# Altium PCB Main Controller.PcbDoc
Units mil, origin at the board's own origin, x right, y up, seen from the top; angles counter-clockwise.
Board outline 2380 x 3120 mil, 2 copper layers (Top Layer, Bottom Layer); 78 components, 83 nets, 282 pads, 1 vias.
Unrouted connection lines stored in the file: 166.
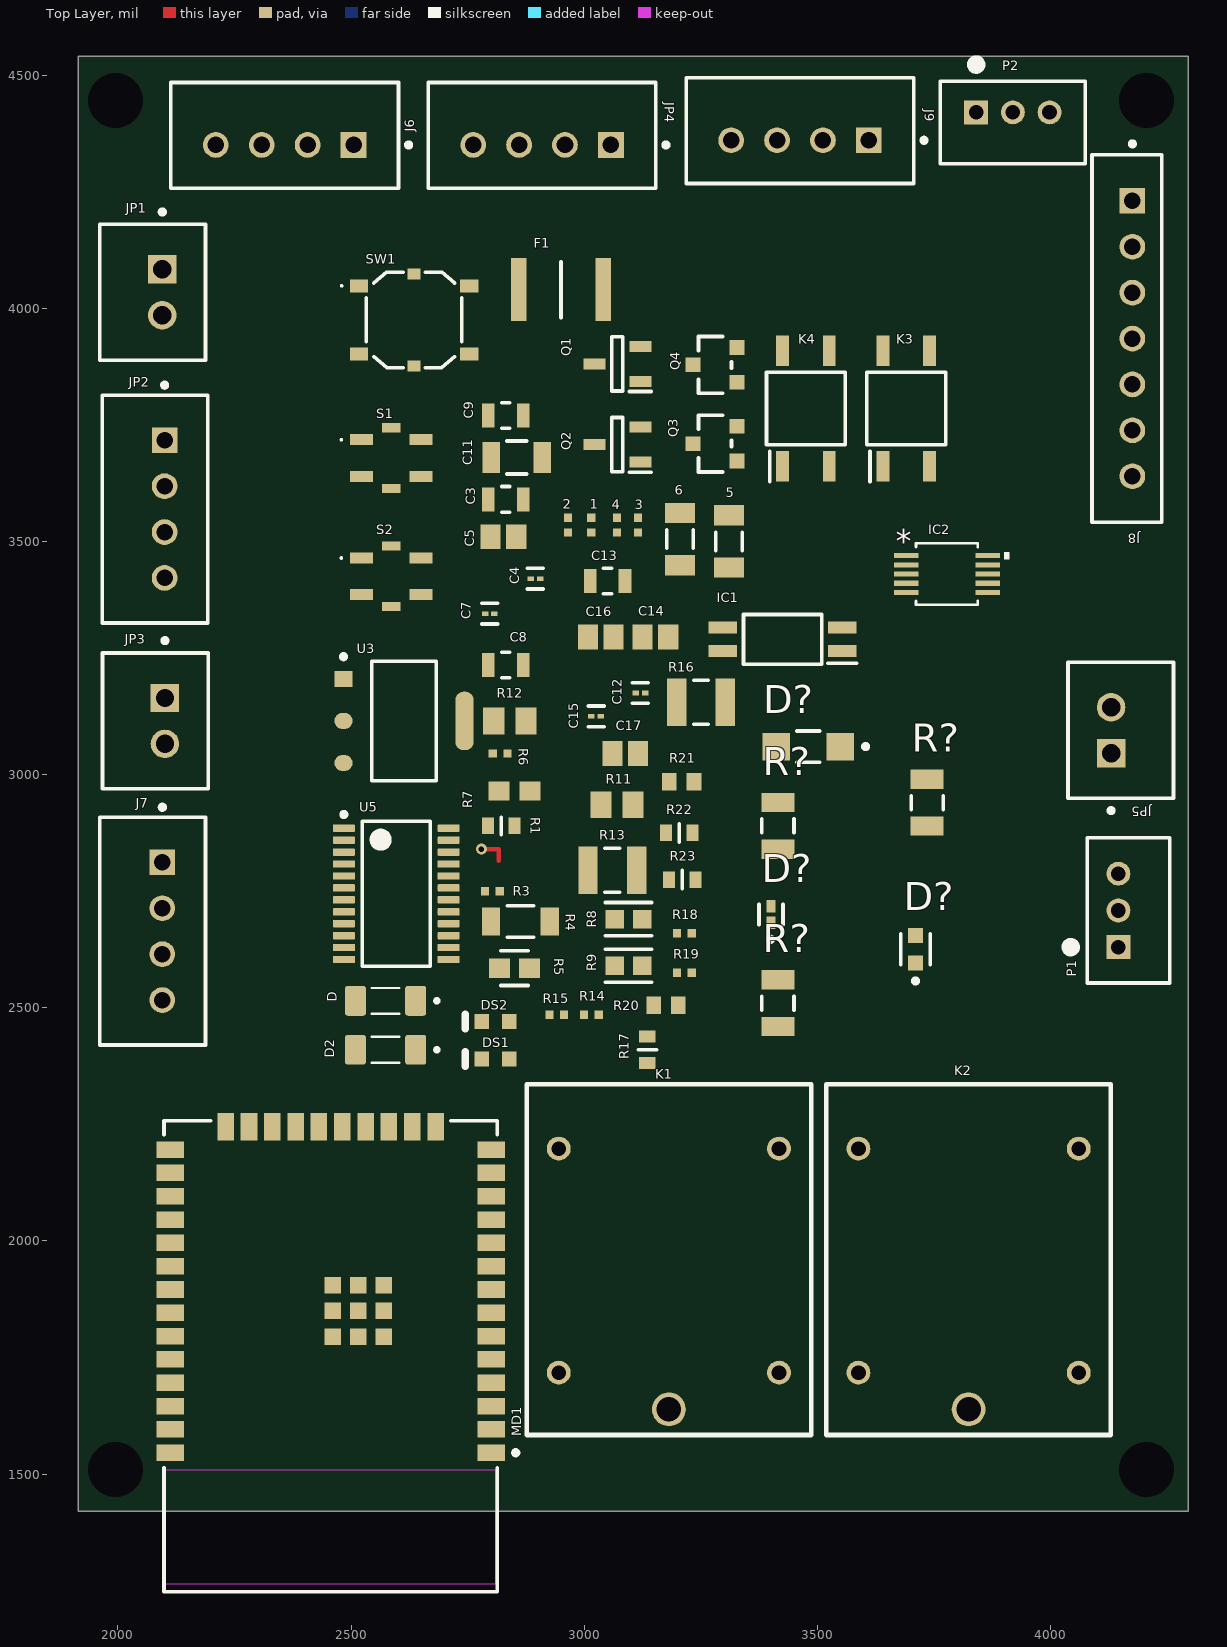
[diagram p0: Top Layer view]
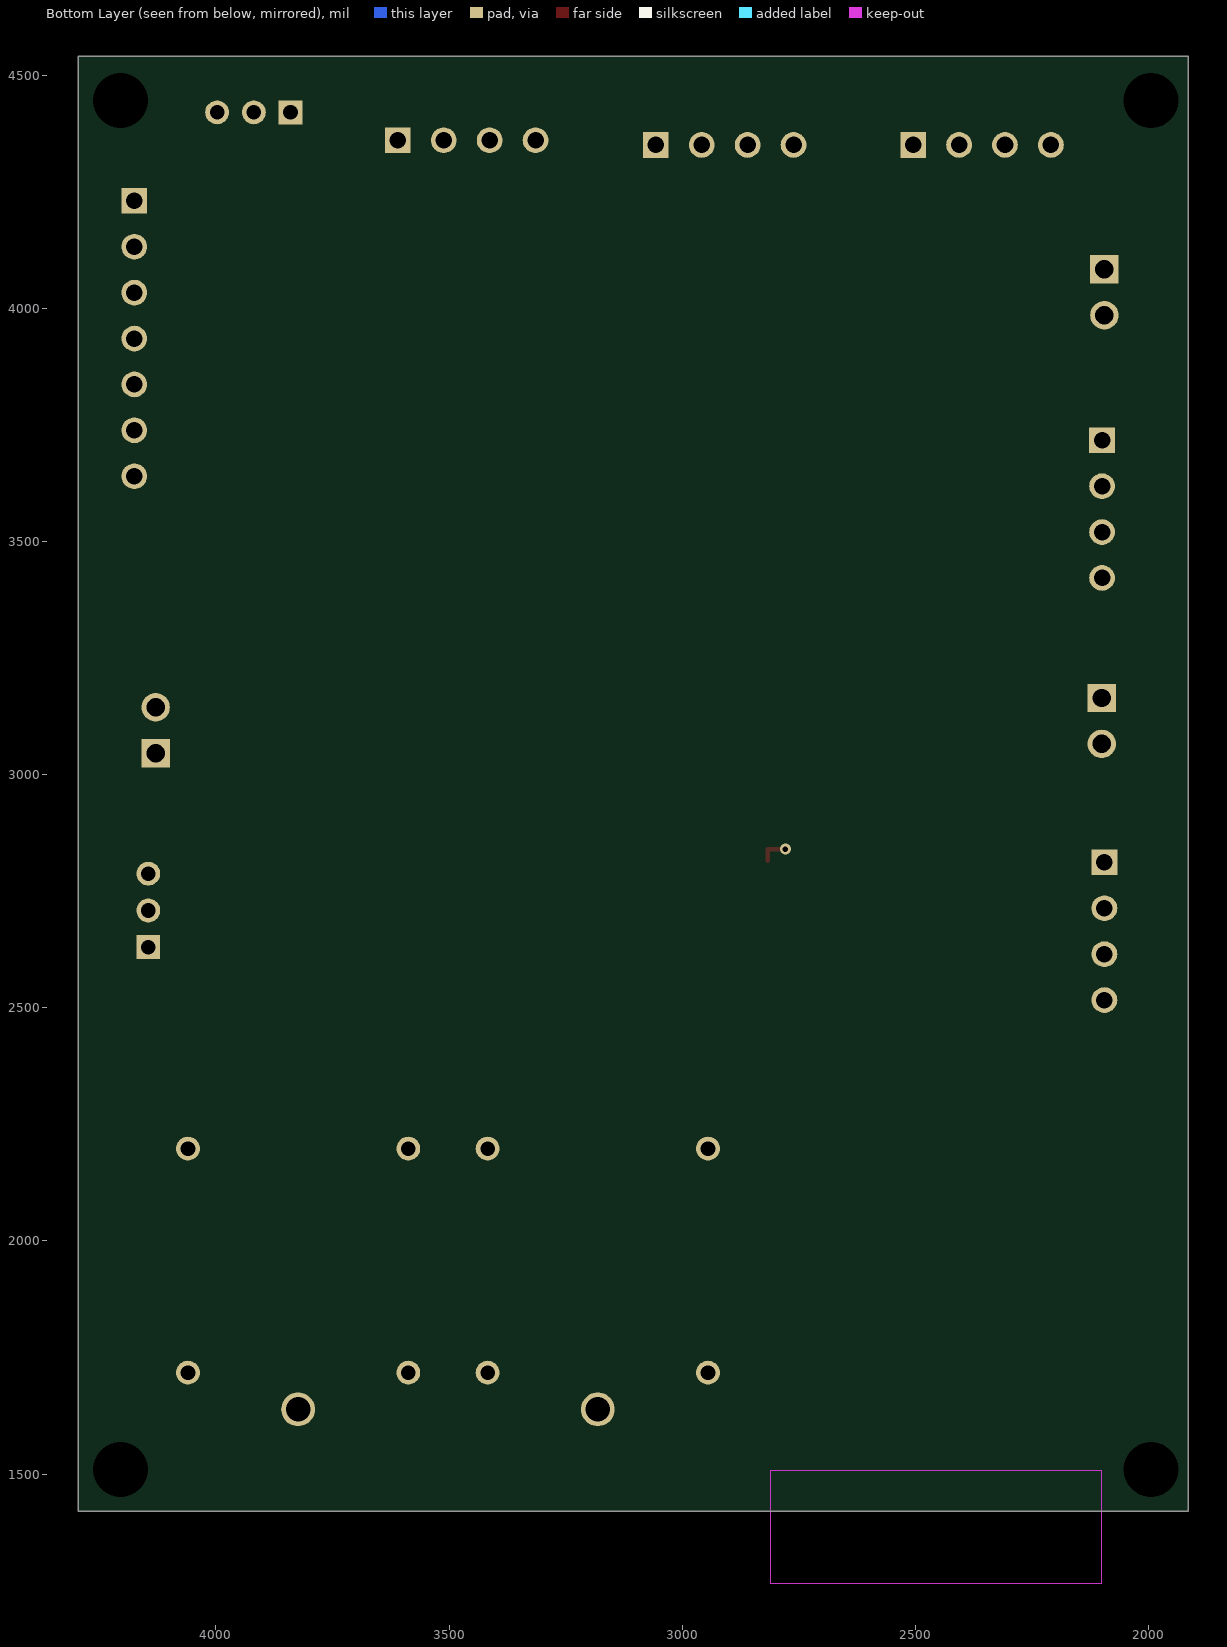
[diagram p1: Bottom Layer view, seen from below]

## Layer stack, top to bottom
Top Solder: solder mask 0.4, Solder Resist, Dk 3.5
Top Layer: signal copper 1.4
Dielectric 1: dielectric 12.6, FR-4, Dk 4.8
Bottom Layer: signal copper 1.4
Bottom Solder: solder mask 0.4, Solder Resist, Dk 3.5

## Board outline
1915,1420 4295,1420 4295,4540 1915,4540

## Design rules (kind name [scope] priority, off if disabled: settings)
BoardOutlineClearance [All] p1: gap=7.87 ignorepadtopadclearanceinfootprint=FALSE
Clearance [All] p1: gap=5 ignorepadtopadclearanceinfootprint=FALSE except(9.84: Arc-Hole Track-Hole SMDPad-Hole THPad-Hole Via-Hole Fill-Hole Poly-Hole Region-Hole Text-Hole)
ComponentClearance [All] p1: gap=5 collisioncheckmode=3 verticalgap=5 showdistances=TRUE
DiffPairsRouting [All] p1: maxlimit=10 minlimit=5 mostfreqgap=5 toplayer_minwidth=5 toplayer_maxwidth=1000 toplayer_prefwidth=5 bottomlayer_minwidth=5 bottomlayer_maxwidth=1000 bottomlayer_prefwidth=5 maxuncoupledlength=500
Height [All] p1: minheight=0 maxheight=71497.94 prefheight=500
HoleSize [All] p1: absolutevalues=TRUE maxlimit=248.03 minlimit=11.81 maxpercent=80.000 minpercent=20.000
HoleToHoleClearance [All] p1: gap=9.84 allowstackedmicrovias=FALSE
MinimumAnnularRing [All] p1: minimumring=3
MinimumSolderMaskSliver [All] p1: minsoldermaskwidth=0
PlaneClearance [All] p1: clearance=5
PlaneConnect PlaneConnectPowerPads [InPadClass('PowerPads')] p1: planeconnectstyle=Direct reliefexpansion=20 reliefentries=4 reliefconductorwidth=10 reliefairgap=10
PlaneConnect [All] p2: pad.planeconnectstyle=Relief pad.reliefexpansion=11.81 pad.reliefentries=4 pad.reliefconductorwidth=5 pad.reliefairgap=5 via.planeconnectstyle=Direct via.reliefexpansion=11.81 via.reliefentries=4 via.reliefconductorwidth=5 via.reliefairgap=5
PolygonConnect PolygonConnectPowerPads [All vs (InPadClass('PowerPads'))] p1: connectstyle=Direct reliefconductorwidth=10 reliefentries=4 polygonreliefangle="90 Angle" airgapwidth=10
PolygonConnect [All] p2: thpad.connectstyle=Relief thpad.reliefconductorwidth=5 thpad.reliefentries=4 thpad.polygonreliefangle="90 Angle" thpad.airgapwidth=5 smdpad.connectstyle=Relief smdpad.reliefconductorwidth=5 smdpad.reliefentries=4 smdpad.polygonreliefangle="90 Angle" smdpad.airgapwidth=5 via.connectstyle=Direct via.reliefconductorwidth=5 via.reliefentries=4 via.polygonreliefangle="90 Angle" via.airgapwidth=5
RoutingVias [All] p1: holewidth=11.81 width=23.62 viastyle="Through Hole" minholewidth=11.81 minwidth=23.62 maxholewidth=23.62 maxwidth=259.84
SilkToSilkClearance [All] p1: silktosilkclearance=0
SilkToSolderMaskClearance [IsPad] p1: minsilkscreentomaskgap=5 clearancetoexposedcopper=TRUE
SolderMaskExpansion [All] p1: expansion=2.95 istentingtop=FALSE
Width [All] p1: maxlimit=1000 minlimit=10 preferedwidth=10 minimp=50.000000 maximp=50.000000 favimp=50.000000
20 further rules are at their usual default settings.

## Classes and differential pairs
component class Sheet1: 1 2 3 4 5 6 C3 C4 C5 C7 C8 C9 C11 C12 C13 C14 C15 C16 C17 D D2 D? DS1 DS2 F1 IC1 IC2 J6 J7 J8 J9 JP1 JP2 JP3 JP4 JP5 K1 K2 K3 K4 MD1 P1 P2 Q1 Q2 Q3 Q4 R1 R3 R4 R5 R6 R7 R8 R9 R11 R12 R13 R14 R15 R16 R17 R18 R19 R20 R21 R22 R23 R? S1 S2 SW1 U3 U5

## Components (designator, comment, footprint, x,y, rotation, side; value= is the part's Value field where it differs from the comment)
1 "ERJ2RKF5600X" RESC1005X40X25LL05T05 3015,3535 r90 top
2 "ERJ2RKF5600X" RESC1005X40X25LL05T05 2965,3535 r90 top
3 "ERJ2RKF5600X" RESC1005X40X25LL05T05 3115,3535 r90 top
4 "ERJ2RKF5600X" RESC1005X40X25LL05T05 3070,3535 r90 top
5 "ERJ8ENF5102V" RESC3216X70X50NL05T20 3310,3500 r90 top
6 "ERJ8ENF5102V" RESC3216X70X50NL05T20 3205,3505 r90 top
C3 "GRM21BR60J226ME39L" FP-GRM21B-0_15-MFG 2831.38,3590 r0 top
C4 "GRM033R61A104KE15D" FP-GRM033-0_03-IPC_C 2895,3420 r0 top
C5 "C0805C105K4PACTU" CAPC2013X145X50LL20T25 2826.46,3510 r0 top
C7 "GRM033R61A104KE15D" FP-GRM033-0_03-IPC_C 2797.18,3345 r180 top
C8 "GRM21BR60J226ME39L" FP-GRM21B-0_15-MFG 2831.38,3235 r0 top
C9 "GRM21BR60J226ME39L" FP-GRM21B-0_15-MFG 2831.38,3770 r0 top
C11 "C1206C104K1RACTU" FP-C1206C-EB-MFG 2855,3680 r180 top value="0.10 μF"
C12 "GRM033R61A104KE15D" FP-GRM033-0_03-IPC_C 3120,3175 r0 top
C13 "GRM21BR60J226ME39L" FP-GRM21B-0_15-MFG 3050,3415 r0 top
C14 "C0805C105K4PACTU" CAPC2013X145X50LL20T25 3152.44,3295 r180 top
C15 "GRM033R61A104KE15D" FP-GRM033-0_03-IPC_C 3025,3125 r180 top
C16 "C0805C105K4PACTU" CAPC2013X145X50LL20T25 3035,3295 r180 top
C17 "C0805C105K4PACTU" CAPC2013X145X50LL20T25 3087.56,3045 r180 top
D "FDLL4148" DIOMELF3414N 2573.7,2515 r180 top
D2 "FDLL4148" DIOMELF3414N 2573.7,2410 r180 top
D? "LTST-C193TBKT-5A" FP-LTST-C193TBKT-5A-MFG 3710,2625.47 r90 top
D? "APG1005CGC-T" FP-APG1005CGC-T-MFG 3400,2700 r90 top
D? "HSMS-C150" FP-HSMS-C150-MFG 3480,3060 r180 top
DS1 "HSMY-C190" AVAG-HSMX-C190_V 2809.42,2390 r180 top
DS2 "HSMY-C190" AVAG-HSMX-C190_V 2809.42,2470.43 r180 top
F1 "MF-MSMF150-2" FUSC4632X85N 2950,4040 r0 top
IC1 "EL3H7_B__TA_-G" SOIC127P700X200-4N 3425,3290 r180 top
IC2 "INA229AIDGST" VSSOP10_DGS_TEX 3777.25,3430 r0 top
J6 "B4B-XH-A(LF)(SN)" FP-B4B-XH-A_LF_SN-MFG#1 2357.36,4370.67 r0 top
J7 "B4B-XH-A(LF)(SN)" FP-B4B-XH-A_LF_SN-MFG#2 2074.33,2664.21 r90 top
J8 "B7B-EH-A(LF)(SN)" FP-B7B-EH-A_LF_SN-MFG 4163.19,3935 r270 top
J9 "B4B-XH-A(LF)(SN)" FP-B4B-XH-A_LF_SN-MFG#2 3462.36,4380.67 r0 top
JP1 "B2B-XH-A(LF)(SN)" FP-B2B-XH-A_LF_SN-MFG 2074.33,4034.21 r270 top
JP2 "B4B-XH-A(LF)(SN)" FP-B4B-XH-A_LF_SN-MFG#2 2079.33,3569.21 r90 top
JP3 "B2B-XH-A(LF)(SN)" FP-B2B-XH-A_LF_SN-MFG 2080,3115 r270 top
JP4 "B4B-XH-A(LF)(SN)" FP-B4B-XH-A_LF_SN-MFG#2 2909.21,4370.67 r0 top
JP5 "B2B-XH-A(LF)(SN)" FP-B2B-XH-A_LF_SN-MFG 4150,3095 r90 top
K1 "SRD-05VDC-SL-C" SRD 3181.22,1638.98 r90 top
K2 "SRD-05VDC-SL-C" SRD 3823.78,1638.98 r90 top
K3 "AQY-282SX" SOP254P680X230-4N 3690,3785 r90 top
K4 "AQY-282SX" SOP254P680X230-4N 3475,3785 r90 top
MD1 "ESP32-WROOM-32E (4MB)" FP-ESP32-WROOM-32E_4MB-MFG 2456.06,1753.03 r180 top
P1 "B3B-PH-K-S(LF)(SN)" JST-B3B-PH-K-S-3_V 4166.65,2708.74 r90 top
P2 "B3B-PH-K-S(LF)(SN)" JST-B3B-PH-K-S-3_V 3918.74,4398.35 r0 top
Q1 "AO3400A" SOT95P280X125-3N 3070.79,3880.47 r180 top
Q2 "AO3401A" SOT95P280X125-3N 3070.79,3707.6 r180 top
Q3 "AO3400A" FP-SOT23-MFG 3280,3709.64 r180 top
Q4 "AO3400A" FP-SOT23-MFG 3280,3878.43 r180 top
R1 "ERJ3EKF1800V" FP-ERJ3EK-MFG 2821.54,2890 r0 top value=180Ω
R3 "ERJ2RKF1002X" RESC1005X40X25LL05T05 2802.84,2750 r0 top
R4 "RT1206FRE072K2L" FP-RT1206-MFG 2862.87,2685 r0 top value=2.2KΩ
R5 "CRCW06031M00FKEA" FP-CRCW0603-e3-IPC_A 2850.39,2585 r0 top
R6 "ERJ2RKF1002X" RESC1005X40X25LL05T05 2819.25,3045 r0 top
R7 "ERJ-3EKF1200V" RESC1609X55X30ML15T15 2850.08,2965 r0 top
R8 "ERA3AEB222V" FP-ERA3A-IPC_B 3094.55,2690 r0 top
R9 "ERA3AEB222V" FP-ERA3A-IPC_B 3094.55,2590 r0 top
R11 "ERJ6ENF2200V" RESC2013X70X40NL20T20 3070,2935 r0 top
R12 "ERJ6ENF2200V" RESC2013X70X40NL20T20 2840.24,3115 r0 top
R13 "ERJ-14NF10R0U" RESC3225X70X50LL20T20 3060,2795 r0 top
R14 "ERJ2RKF1002X" RESC1005X40X25LL05T05 3015,2485 r180 top
R15 "ERJ2RKF1002X" RESC1005X40X25LL05T05 2940.75,2485 r180 top
R16 "ERJ-14NF10R0U" RESC3225X70X50LL20T20 3250,3155 r0 top
R17 "ERA-3AEB223V" FP-ERA3A-MFG 3135,2410 r270 top
R18 "ERJ2RKF1002X" RESC1005X40X25LL05T05 3214.25,2660 r180 top
R19 "ERJ2RKF1002X" RESC1005X40X25LL05T05 3214.25,2575 r180 top
R20 "ERJ-3GEYJ513V" RESC1608X55X30NL15T15 3175,2505 r180 top
R21 "ERJ-3GEYJ513V" RESC1608X55X30NL15T15 3208.42,2985 r0 top
R22 "ERA-3AEB223V" FP-ERA3A-MFG 3203.5,2875 r180 top
R23 "ERA-3AEB223V" FP-ERA3A-MFG 3210,2775 r180 top
R? "CRCW1206330RFKEA" FP-CRCW1206-e3-MFG 3735,2940 r90 top
R? "CRCW1206330RFKEA" FP-CRCW1206-e3-MFG 3415,2890 r90 top
R? "CRCW1206330RFKEA" FP-CRCW1206-e3-MFG 3415,2510 r90 top
S1 "TS21-34-035-BK-160-SMT-TR" TS2134035BK160SMTTR 2585.79,3678.66 r0 top
S2 "TS21-34-035-BK-160-SMT-TR" TS2134035BK160SMTTR 2585.79,3425.04 r0 top
SW1 "PTS526SMG20SMTR21_LFS" PTS526SMG20SMTR21LFS 2635,3975 r0 top
U3 "AMS1117-3.3" FP-AMS1117-IPC_C 2613.23,3115 r0 top
U5 "TCA6416APWR" PW0024A_L 2596.61,2744.25 r0 top

## Footprints (in the part's own frame and the unit in brackets; to place one, negate y for a bottom-side part, rotate by r counter-clockwise, add the part's x,y. Pads: shape width x height; smd on the part's side, far side on the other; paste and mask are expansions set on the pad)
AVAG-HSMX-C190_V [mm] "SMD, 2-Leads, Body 1.6x0.8mm, Height 0.9mm"
  rect 0.8x0.8 smd: 1(-0.75,0) 2(0.75,0)
  silkscreen extent 1.65,-0.4 1.65,0.4, body extent -0.8,-0.4 0.8,0.4, height 0.9
CAPC2013X145X50LL20T25 [mm] "Chip Capacitor, 2-Leads, Body 2.00x1.25mm, IPC High Density"
  rect 1.1x1.35 smd: 1(-0.7,0) 2(0.7,0)
  body extent -1.1,-0.72 1.1,0.72, height 1.45
DIOMELF3414N [mm]
  rrect25% 1.14x1.63 smd: A(1.64,0) C(-1.64,0)
  silkscreen extent -2.9,-0.7 0.75,0.7
FP-AMS1117-IPC_C [mm]
  rect 1.004x0.872 smd paste+0 mask+0: 1(-3.295,2.29)
  rrect100% 1.004x0.872 smd paste+0 mask+0: 2(-3.295,0) 3(-3.295,-2.29)
  rrect87% 1.004x3.182 smd paste+0 mask+0: 4(3.295,0)
  silkscreen extent -3.42,-3.25 1.75,3.62, body extent -3.9,-3.35 3.9,3.35, height 0.25
FP-APG1005CGC-T-MFG [mm]
  rect 0.7x0.5 smd paste+0 mask+0: 1(-0.45,0) 2(0.45,0)
  silkscreen extent -1.47,-0.65 0.55,0.65, body extent -0.9,-0.4 0.9,0.4, height 0.25
FP-B2B-XH-A_LF_SN-MFG [mm]
  rect 1.55x1.55 hole 1 paste-1000 mask+0: 1(-1.25,0.525)
  round 1.55 hole 1 paste-1000 mask+0: 2(1.25,0.525)
  silkscreen extent -4.5,-2.88 3.7,2.87, body extent -3.8,-2.98 3.8,2.98, height 0.25
FP-B4B-XH-A_LF_SN-MFG#1 [mm]
  rect 1.4x1.4 hole 0.9 paste-1000 mask+0: 1(3.75,-0.525)
  round 1.4 hole 0.9 paste-1000 mask+0: 2(1.25,-0.525) 4(-3.75,-0.525) " "(-1.25,-0.525)
  silkscreen extent -6.2,-2.88 6.88,2.87, body extent -6.3,-2.98 6.3,2.98, height 0.25
FP-B4B-XH-A_LF_SN-MFG#2 [mm]
  rect 1.4x1.4 hole 0.9 paste-1000 mask+0: 1(3.75,-0.525)
  round 1.4 hole 0.9 paste-1000 mask+0: 2(1.25,-0.525) 3(-1.25,-0.525) 4(-3.75,-0.525)
  silkscreen extent -6.2,-2.88 6.87,2.87, body extent -6.3,-2.98 6.3,2.98, height 0.25
FP-B7B-EH-A_LF_SN-MFG [mm]
  rect 1.4x1.4 hole 0.9 paste-1000 mask+0: 1(-7.5,0.3)
  round 1.4 hole 0.9 paste-1000 mask+0: 2(-5,0.3) 3(-2.5,0.3) 4(0,0.3) 5(2.5,0.3) 6(5,0.3) 7(7.5,0.3)
  silkscreen extent -10.72,-1.9 10,1.9, body extent -10.1,-2 10.1,2, height 0.25
FP-C1206C-EB-MFG [mm]
  rect 0.95x1.7 smd paste+0 mask+0: 1(-1.4,0) 2(1.4,0)
  silkscreen extent -0.55,-0.9 0.55,0.9, body extent -2,-1 2,1, height 0.25
FP-CRCW0603-e3-IPC_A [mil]
  rect 44.69x41.82 smd paste+0 mask+0: 1(-32.1,0) 2(32.1,0)
  silkscreen extent -30,-37 30,37, body extent -74,-41 74,41, height 10
FP-CRCW1206-e3-MFG [mm]
  rect 1.05x1.8 smd paste+0 mask+0: 1(-1.275,0) 2(1.275,0)
  silkscreen extent -0.38,-0.87 0.38,0.87, body extent -1.9,-1 1.9,1, height 0.25
FP-ERA3A-IPC_B [mil]
  rect 39.58x39.61 smd paste+0 mask+0: 1(-29.55,0) 2(29.55,0)
  silkscreen extent -49,-36 49,36, body extent -59,-30 59,30, height 10
FP-ERA3A-MFG [mm]
  rect 0.65x0.9 smd paste+0 mask+0: 1(-0.725,0) 2(0.725,0)
  silkscreen extent 0,-0.5 0,0.5, body extent -1.15,-0.6 1.15,0.6, height 0.25
FP-ERJ3EK-MFG [mm]
  rect 0.65x0.9 smd paste+0 mask+0: 1(-0.725,0) 2(0.725,0)
  silkscreen extent 0,-0.47 0,0.47, body extent -1.15,-0.58 1.15,0.58, height 0.25
FP-ESP32-WROOM-32E_4MB-MFG [mm]
  rect 1.5x0.9 smd paste+0 mask+0: 1(-8.75,5.26) 2(-8.75,3.99) 3(-8.75,2.72) 4(-8.75,1.45) 5(-8.75,0.18) 6(-8.75,-1.09) 7(-8.75,-2.36) 8(-8.75,-3.63) 9(-8.75,-4.9) 10(-8.75,-6.17) 11(-8.75,-7.44) 12(-8.75,-8.71) 13(-8.75,-9.98) 14(-8.75,-11.25) 25(8.75,-11.25) 26(8.75,-9.98) 27(8.75,-8.71) 28(8.75,-7.44) 29(8.75,-6.17) 30(8.75,-4.9) 31(8.75,-3.63) 32(8.75,-2.36) 33(8.75,-1.09) 34(8.75,0.18) 35(8.75,1.45) 36(8.75,2.72) 37(8.75,3.99) 38(8.75,5.26)
  rect 0.9x1.5 smd paste+0 mask+0: 15(-5.71,-12.5) 16(-4.44,-12.5) 17(-3.17,-12.5) 18(-1.9,-12.5) 19(-0.63,-12.5) 20(0.64,-12.5) 21(1.91,-12.5) 22(3.18,-12.5) 23(4.45,-12.5) 24(5.72,-12.5)
  rect 0.9x0.9 smd paste+0 mask+0: 39(-2.9,-1.06) 39(-2.9,-3.86) 39(-2.9,-2.46) 39(-1.5,-1.06) 39(-1.5,-2.46) 39(-1.5,-3.86) 39(-0.1,-1.06) 39(-0.1,-2.46) 39(-0.1,-3.86)
  Keep-Out Layer region: -9,6.203 9,6.203 9,12.393 -9,12.393
  Keep-Out Layer region: -9,6.203 9,6.203 9,12.393 -9,12.393
  silkscreen extent -10.2,-12.82 9.07,12.83, body extent -9.6,-13.35 9.6,12.93, height 0.25
FP-GRM21B-0_15-MFG [mm]
  rect 0.7x1.3 smd paste+0 mask+0: 1(-0.95,0) 2(0.95,0)
  silkscreen extent -0.22,-0.7 0.22,0.7, body extent -1.4,-0.8 1.4,0.8, height 0.25
FP-GRM033-0_03-IPC_C [mil]
  rect 13.94x10.34 smd paste+0 mask+0: 1(-10.01,0) 2(10.01,0)
  silkscreen extent -17,-22 17,22, body extent -21,-10 21,10, height 10
FP-HSMS-C150-MFG [mm]
  rect 1.5x1.5 smd paste+0 mask+0: 1(-1.75,0) 2(1.75,0)
  silkscreen extent -3.25,-0.85 0.63,0.85, body extent -2.6,-0.95 2.6,0.95, height 0.25
FP-LTST-C193TBKT-5A-MFG [mm]
  rect 0.8x0.8 smd paste+0 mask+0: 1(-0.75,0) 2(0.75,0)
  silkscreen extent -1.85,-0.8 0.85,0.8, body extent -1.25,-0.55 1.25,0.55, height 0.25
FP-RT1206-MFG [mm]
  rect 1x1.5 smd paste+0 mask+0: 1(-1.6,0) 2(1.6,0)
  silkscreen extent -0.73,-0.85 0.73,0.85, body extent -2.2,-0.95 2.2,0.95, height 0.25
FP-SOT23-MFG [mm]
  rect 0.8x0.8 smd paste+0 mask+0: 1(-1.2,0.95) 2(-1.2,-0.95) 3(1.2,0)
  silkscreen extent -0.9,-1.55 0.9,1.55, body extent -1.7,-1.78 1.7,1.78, height 0.25
FUSC4632X85N [mm]
  rect 0.85x3.43 smd: 1(-2.3,0) 2(2.3,0)
  silkscreen extent 0,-1.52 0,1.52, body extent -2.27,-1.62 2.27,1.62, height 0.85
JST-B3B-PH-K-S-3_V [mm] "Connector, 3-Leads, Body 7.9x4.5mm, Pitch 2mm"
  rect 1.3x1.3 hole 0.8: 1(-2,0.55)
  round 1.3 hole 0.8: 2(0,0.55) 3(2,0.55)
  silkscreen extent -3.95,-2.25 3.95,3.4, body extent -3.95,-2.25 3.95,2.25, height 6
PTS526SMG20SMTR21LFS [mm]
  rect 1x0.7 smd: 1(-3,1.85) 2(3,1.85) 3(-3,-1.85) 4(3,-1.85)
  rect 0.7x0.6 smd: 5(0,2.5) 6(0,-2.5)
  silkscreen extent -4,-2.6 2.6,2.6, body extent -3.2,-2.55 3.2,2.55, height 2
PW0024A_L [mm] "SOP, 24-Leads, Body 7.9x4.5mm, Pitch 0.65mm, IPC High Density"
  rrect25% 1.2x0.4 smd: 1(-2.85,3.575) 2(-2.85,2.925) 3(-2.85,2.275) 4(-2.85,1.625) 5(-2.85,0.975) 6(-2.85,0.325) 7(-2.85,-0.325) 8(-2.85,-0.975) 9(-2.85,-1.625) 10(-2.85,-2.275) 11(-2.85,-2.925) 12(-2.85,-3.575) 13(2.85,-3.575) 14(2.85,-2.925) 15(2.85,-2.275) 16(2.85,-1.625) 17(2.85,-0.975) 18(2.85,-0.325) 19(2.85,0.325) 20(2.85,0.975) 21(2.85,1.625) 22(2.85,2.275) 23(2.85,2.925) 24(2.85,3.575)
  silkscreen extent -2.97,-3.95 1.85,4.45, body extent -3.21,-3.9 3.21,3.9, height 1
RESC1005X40X25LL05T05 [mm] "Chip Resistor, 2-Leads, Body 1.05x0.55mm, IPC High Density"
  rect 0.45x0.45 smd: 1(-0.4,0) 2(0.4,0)
  body extent -0.53,-0.28 0.53,0.28, height 0.4
RESC1608X55X30NL15T15 [mm] "Chip Resistor, 2-Leads, Body 1.60x0.80mm, IPC Medium Density"
  rect 0.8x0.95 smd: 1(-0.675,0) 2(0.675,0)
  body extent -0.87,-0.48 0.87,0.48, height 0.55
RESC1609X55X30ML15T15 [mm] "Chip Resistor, 2-Leads, Body 1.75x0.95mm, IPC Low Density"
  rect 1.15x1.05 smd: 1(-0.85,0) 2(0.85,0)
  body extent -0.87,-0.48 0.87,0.48, height 0.55
RESC2013X70X40NL20T20 [mm] "Chip Resistor, 2-Leads, Body 2.00x1.25mm, IPC Medium Density"
  rect 1.15x1.45 smd: 1(-0.875,0) 2(0.875,0)
  body extent -1.1,-0.72 1.1,0.72, height 0.7
RESC3216X70X50NL05T20 [mm] "Chip Resistor, 2-Leads, Body 3.20x1.60mm, IPC Medium Density"
  rect 1.1x1.65 smd: 1(-1.425,0) 2(1.425,0)
  silkscreen extent -0.5,-0.73 0.5,0.73, body extent -1.63,-0.82 1.62,0.82, height 0.7
RESC3225X70X50LL20T20 [mm] "Chip Resistor, 2-Leads, Body 3.20x2.50mm, IPC High Density"
  rect 1.05x2.6 smd: 1(-1.325,0) 2(1.325,0)
  silkscreen extent -0.4,-1.2 0.4,1.2, body extent -1.7,-1.35 1.7,1.35, height 0.7
SOIC127P700X200-4N [mm]
  rect 1.55x0.65 smd: 1(-3.25,0.635) 2(-3.25,-0.635) 3(3.25,-0.635) 4(3.25,0.635)
  silkscreen extent -4.02,-1.35 2.13,1.35, body extent -3.5,-1.35 3.5,1.35, height 2
SOP254P680X230-4N [mm]
  rect 1.65x0.7 smd: 1(-3.15,1.27) 2(-3.15,-1.27) 3(3.15,-1.27) 4(3.15,1.27)
  silkscreen extent -3.97,-2.15 1.98,2.15, body extent -3.4,-2.15 3.4,2.15, height 2.3
SOT95P280X125-3N [mm]
  rect 1.2x0.6 smd: 1(-1.25,0.95) 2(-1.25,-0.95) 3(1.25,0)
  silkscreen extent -1.85,-1.47 0.3,1.5, body extent -1.4,-1.48 1.4,1.48, height 1.25
SRD [mm]
  round 1.84 hole 1.34: 1(0,0)
  round 1.3 hole 0.8: 2(2,6) 3(2,-6) 4(14.2,6) 5(14.2,-6)
  silkscreen extent -1.4,-7.75 17.7,7.75, body extent -1.35,-7.5 17.65,7.5, height 15.04
TS2134035BK160SMTTR [mm]
  rect 1.25x0.6 smd: 1(-1.625,1) 2(1.625,1) 3(-1.625,-1) 4(1.625,-1)
  rect 1x0.5 smd: MP1(0,1.65) MP2(0,-1.65)
  silkscreen extent -2.76,0.95 -2.66,1.05, body extent -2.19,-1.85 2.19,1.85, height 1.8
VSSOP10_DGS_TEX [mil]
  rect 52.5x11 smd paste+0 mask+0: 1(-87.25,39.38) 2(-87.25,19.69) 3(-87.25,0) 4(-87.25,-19.69) 5(-87.25,-39.38) 6(87.25,-39.38) 7(87.25,-19.69) 8(87.25,0) 9(87.25,19.69) 10(87.25,39.38)
  silkscreen extent -66,-66 134,66, body extent -99,-61 99,61, height 43

## Part data
1 2 3 4: library part CMP-2002-01159-2, "Chip Resistor, 560 Ohm, +/- 1%, 0.1 W, -55 to 155 degC, 0402 (1005 Metric), RoHS, Tape and Reel", Case Code (Imperial)=0402, Case Code (Metric)=1005, Max Operating Temperature="155 degC", Min Operating Temperature="-55 degC", Package Quantity=10000, Power Rating="100 mW", Resistance="560 Ohm", Tolerance=1%, Voltage Rating="50 V", Case\Package=0402, ComponentLink1Description="Manufacturer URL", ComponentLink1URL=http://www.panasonic.com/, ComponentLink2Description=Datasheet, ComponentLink2URL=http://industrial.panasonic.com/cdbs/www-data/pdf/RDA0000/AOA0000C86.pdf, DatasheetVersion=04/2015, Height="0.35 mm", Length="1 mm", Mount="Surface Mount", Mounting Technology="Surface Mount", PackageDescription="2-Pin Surface Mount Device, Body 1 x 0.5 mm", PackageReference=0402, Packaging="Tape and Reel", Pins=2, Radiation Hardening=No, REACH SVHC=Yes, RoHSCompliant=true, Width="0.5 mm"
5 6: library part CMP-2003-00854-1, Manufacturer=Panasonic, Part Number=ERJ8ENF5102V
C3 C8 C9 C13: library part CMP-2007-03385-2, "Chip Multilayer Ceramic Capacitors for General Purpose, 0805, 22uF, X5R, 15%, 20%, 6.3V", Capacitance=22uF, Case Code (Imperial)=0805, Case Code (Metric)=2012, Dielectric=X5R, Max Operating Temperature=85°C, Min Operating Temperature=-55°C, Package Quantity=1, Tolerance=20%, Voltage=6.3V, Case/Package=0805, Depth=1.25mm, Height=1.25mm, Lead Free="Lead Free", Length=2mm, Material=Ceramic, Mount="Surface Mount", Packaging="Tape and Reel", Radiation Hardening=No, REACH SVHC="No SVHC", Termination=SMD/SMT, Thickness=0.053inch, Voltage Rating=6.3V, Voltage Rating (DC)=6.3V, Width=0.049inch
C4 C7 C12 C15: library part CMP-2010-01264-2, "Chip Multilayer Ceramic Capacitors for General Purpose, 0201, 0.10uF, X5R, 15%, 10%, 10V", Capacitance=100nF, Case Code (Imperial)=0201, Case Code (Metric)=0603, Dielectric=X5R, Max Operating Temperature=85°C, Min Operating Temperature=-55°C, Package Quantity=1, Tolerance=10%, Voltage=10V, Case/Package=0201, Depth=0.3mm, Height=0.3mm, Lead Free="Lead Free", Length=0.6mm, Mount="Surface Mount", Packaging="Tape and Reel", Radiation Hardening=No, REACH SVHC="No SVHC", Termination=SMD/SMT, Thickness=0.013inch, Voltage Rating=10V, Voltage Rating (DC)=10V, Weight=6E-06oz, Width=0.012inch
C5 C14 C16 C17: library part CMP-1036-04746-2, Capacitance=1uF, Manufacturer=Kemet, Part Number=C0805C105K4PACTU
C11: library part CMP-03020-000153-1, "CAP CER 0.1UF 100V X7R 1206", Capacitance="0.10 μF", Manufacturer=KEMET, Package=C1206C-EB, Temperature="-55°C to +150°C", Temperature Characteristic=X7R, Temperature Coefficient=15%, Temperature Range High=+150°C, Temperature Range Low=-55°C, Tolerance=0.1, Voltage Rating="100 V", Automotive=Yes, Automotive Grade="Grade 0", Category=Cap, ComponentLink2Description=Datasheet, ComponentLink2URL=https://content.kemet.com/datasheets/KEM_C1007_X8R_ULTRA_150C_SMD.pdf, Device Class L1="Passive Components", Device Class L2=Capacitors, Device Class L3="Ceramic Capacitors", Digikey Description="CAP CER 0.1UF 100V X7R 1206", Height=0.88mm, Ipc Land Pattern Name=CAPC320160X78, Lead Free=Yes, Manufacturer Part Number=C1206C104K1RACTU, Material=Ceramic, Mouser Description="CAP CER 0.1UF 100V X7R 1206", Octopart=https://octopart.com/c1206c104k1ractu-kemet-89521, RoHS=TRUE
D D2: "Diode Standard 100V 200mA Surface Mount SOD-80", Package="SOD-80-2 ON Semiconductor", Check_prices=https://www.snapeda.com/parts/FDLL4148/ON%20Semiconductor/view-part/2783433/?ref=eda, Digi-Key_Part_Number=FDLL4148CT-ND, DigiKey-Purchase-URL=https://snapeda.com/shop?store=DigiKey&id=2783433, MF="ON Semiconductor", Mouser-Purchase-URL=https://snapeda.com/shop?store=Mouser&id=2783433, MP=FDLL4148, SnapEDA_Link=https://www.snapeda.com/parts/FDLL4148/ON%20Semiconductor/view-part/2783433/?ref=snap
D?: library part CMP-2000-06624-2, "LED BLUE CLEAR CHIP SMD", Case Code (Imperial)=0603, Case Code (Metric)=1608, Color=Blue, Forward Current=20mA, Forward Voltage=2.8V, Lens Color=Colorless, Max Operating Temperature=80°C, Min Operating Temperature=-20°C, Package Quantity=1, Power Dissipation=76mW, Reverse Voltage=5V, Test Current=5mA, Case/Package=0603, Depth=0.8mm, Dominant Wavelength=475nm, Height=0.35mm, Illumination Color=Blue, Lead Free="Lead Free", Length=1.6mm, Lens Style=Diffused, Lens Transparency=Clear, Luminous Intensity=15mcd, Mount="Surface Mount", Number of Elements=1, Number of LEDs=1, Number of Pins=2, Packaging="Tape and Reel", Radiation Hardening=No, RoHS Compliant=Yes, Viewing Angle=130°, Width=0.8mm
D?: library part CMP-44529-000029-1, "LED GREEN CLEAR CHIP SMD", Case Code (Imperial)=0402, Case Code (Metric)=1005, Color=Green, Forward Voltage=2V, Lens Color=Colorless, Package Quantity=1, Test Current=20mA, Case/Package=0402, Dominant Wavelength=571nm, Height=0.25mm, Lead Free="Lead Free", Length=1mm, Lens Transparency=Clear, Luminous Intensity=35mcd, Mount="Surface Mount", Packaging="Tape and Reel", Viewing Angle=120°, Width=0.5mm
D?: library part CMP-21615-000001-1, "LED RED DIFFUSED CHIP SMD", Case Code (Imperial)=1206, Case Code (Metric)=3216, Color=Red, Forward Current=20mA, Forward Voltage=2.1V, Lens Color=White, Max Operating Temperature=85°C, Min Operating Temperature=-40°C, Package Quantity=1, Power Dissipation=65mW, Reverse Voltage=5V, Case/Package=1206, Depth=1.6mm, Dominant Wavelength=626nm, Height=1.1mm, Illumination Color=Red, Lead Free="Lead Free", Length=3.2mm, Lens Style=Rectangular, Lens Transparency=Diffused, Luminous Intensity=10mcd, Mount="Surface Mount", Number of Elements=1, Number of LEDs=1, Number of Pins=2, Packaging="Tape and Reel", Power Rating=65mW, Radiation Hardening=No, REACH SVHC="No SVHC", Test Current=20mA, Viewing Angle=170°, Wavelength=626nm, Width=1.6mm
DS1 DS2: library part CMP-1744-00003-1, "LED Uni-Color Yellow, 65 mW, 20 mA, -40 to 85 degC, 2-Pin SMD, RoHS, Tape and Reel", Case Code (Imperial)=0603, Case Code (Metric)=1608, Max Operating Temperature="155 degC", Min Operating Temperature="-55 degC", Package Quantity=5000, Power Rating="100 mW", Resistance="390 Ohm", Tolerance=1%, Voltage Rating="50 V", Case\Package=0603, ComponentLink1Description="Manufacturer URL", ComponentLink1URL=http://www.avagotech.com/, ComponentLink2Description=Datasheet, ComponentLink2URL=http://docs.avagotech.com/docs/AV02-0551EN, ComponentLink3Description="Package Specification", ComponentLink3URL=http://www.fairchildsemi.com/dwg/MA/MA03D.pdf, DatasheetVersion=Mar-12, Height="0.45 mm", Length="1.6 mm", Mount="Surface Mount", PackageDescription="2-Pin Surface Mount Device, Body 1.6 x 0.8 mm, Height 0.9 mm", PackageReference=HSMX-C190, Packaging="Tape and Reel", Pins=2, REACH SVHC="No SVHC", RoHSCompliant=true, Voltage Rating (DC)="50 V", Width="0.8 mm"
F1: "Fuse", Manufacturer_Name=Bourns, Mouser Part Number=652-MF-MSMF150-2, Arrow Part Number=MF-MSMF150-2, Arrow Price/Stock=https://www.arrow.com/en/products/mf-msmf150-2/bourns?region=nac, Datasheet Link=https://componentsearchengine.com/Datasheets/2/MF-MSMF150-2.pdf, Height=0.85mm, Manufacturer_Part_Number=MF-MSMF150-2, Mouser Price/Stock=https://www.mouser.co.uk/ProductDetail/Bourns/MF-MSMF150-2?qs=VJkZAnU6DY2RTCSZT8Bxqg%3D%3D
IC1: "Integrated Circuit", Arrow Part Number=EL3H7(B)(TA)-G, Manufacturer_Name=Everlight, Mouser Part Number=638-EL3H7BTAG, Arrow Price/Stock=https://www.arrow.com/en/products/el3h7-b-ta-g/everlight-electronics?region=nac, Datasheet Link=https://www.arrow.com/en/products/el3h7-b-ta-g/everlight-electronics?region=nac, Height=2mm, Manufacturer_Part_Number=EL3H7(B)(TA)-G, Mouser Price/Stock=https://www.mouser.co.uk/ProductDetail/Everlight/EL3H7BTA-G?qs=8PzhAHr7IdM%252B0XGOXhFFCg%3D%3D
IC2: "No Description Available", Mfr_Name="Texas Instruments", RefDes=RefDes, Type=Linear
J6 J7 J9 JP2 JP4: library part CMP-17439-000250-1, "CONN HEADER VERT 4POS 2.5MM", Color=Natural, Contact Resistance=20mR, Current Rating=3A, Flammability Rating="UL94 V-0", Housing Color=White, Insulation Resistance=1GR, Max Operating Temperature=85°C, Max Voltage Rating (AC)=250V, Min Operating Temperature=-25°C, Package Quantity=500, Connector Type=Header, Contact Finish - Mating=TIN, Contact Material=Brass, Contact Plating=Tin, Contact Shape=Square, Contact Type="Male Pin", Depth=5.75mm, Fastening Type=Detent, Gender=Male, Housing Material=Polyamide, Insulation Color=Natural, Insulation Material=Nylon, Lead Free="Lead Free", Lead Pitch=2.5mm, Length=12.4mm, Mated Stacking Heights=9.8mm, Material=Polyamide, Max Current Rating=3A, Max Voltage Rating (DC)=250V, Mount="Through Hole", Number of Contacts=4, Number of Positions=4, Number of Rows=1, Orientation=Straight, Packaging=Bulk, Pitch=2.5mm, REACH SVHC="No SVHC", Series=XH, Termination=Solder, Voltage Rating=250V, Voltage Rating (AC)=250V, Wire/Cable Gauge=22AWG
  JP2: Purpose=UART
  JP4: Purpose=JTAG
J8: library part CMP-17439-000532-1, "CONN HEADER VERT 7POS 2.5MM", Color=Natural, Current Rating=3A, Flammability Rating="UL94 V-0", Housing Color=White, Voltage Rating=250V, Connector Type=Header, Contact Finish - Mating=TIN, Contact Material=Brass, Contact Mating Length=0.13inch, Contact Plating=Tin, Contact Shape=Square, Contact Type="Male Pin", Fastening Type=Friction, Gender=Male, Housing Material=Nylon, Insulation Color=Natural, Insulation Material=Nylon, Lead Free="Lead Free", Mated Stacking Heights=8.1mm, Mount="Through Hole", Number of Contacts=7, Number of Positions=7, Number of Rows=1, Orientation=Straight, Packaging=Bulk, Pitch=2.5mm, Series=EH, Termination=Solder
JP1 JP3 JP5: library part CMP-2000-05888-3, "CONN HEADER VERT 2POS 2.5MM", Color=Natural, Contact Resistance=20mR, Current Rating=3A, Housing Color=White, Insulation Resistance=1GR, Max Operating Temperature=85°C, Max Voltage Rating (AC)=250V, Min Operating Temperature=-25°C, Connector Type="Male Pin", Contact Material=Brass, Contact Plating=Tin, Contact Type="Male Pin", Depth=5.75mm, Fastening Type=Detent, Housing Material=Polyamide, Lead Free="Lead Free", Lead Pitch=2.5mm, Length=7.4mm, Max Current Rating=3A, Max Voltage Rating (DC)=250V, Mount="Through Hole", Number of Contacts=2, Number of Positions=2, Number of Rows=1, Orientation=Straight, Packaging=Bulk, Pitch=2.5mm, Purpose="Boot Option", REACH SVHC="No SVHC", Series=XH, Termination=Solder, Voltage Rating=250V, Voltage Rating (AC)=250V, Wire/Cable Gauge=22AWG
K1 K2: "Relay or Contactor", Manufacturer_Name="Songle Relay", Datasheet Link=http://files.microjpm.webnode.com/200001010-dda41de9e1/Songle%20Relay%20Datasheet.pdf, Manufacturer_Part_Number=SRD-05VDC-SL-C
K3 K4: "Relay or Contactor", Manufacturer_Name=Panasonic, Datasheet Link=https://componentsearchengine.com/Datasheets/2/AQY282SX.pdf, Height=2.3mm, Manufacturer_Part_Number=AQY-282SX
MD1: library part CMP-194065-000026-1, "RX TXRX MOD WIFI TRACE ANT SMD"
P1 P2: library part CMP-2000-05164-1, "Male Header, Pitch 2 mm, 1 x 3 Position, Height 6 mm, Tail Length 3.4 mm, -25 to 85 degC, RoHS, Bulk", Manufacturer=JST, Datasheet URL=https://datasheet.ciiva.com/11746/0900766b80826550-11746939.pdf, Datasheet Version=Oct-06, Manufacturer URL=http://www.jst.com/home2.html, No of Positions=3, Pitch=2mm, Style/Orientation=StraightHeader/Plug, Termination=Crimp, Type=ShroudedHeader
Q1: "MOSFET (N-Channel)", Manufacturer_Name="Alpha & Omega Semiconductors", Arrow Part Number=AO3400A, Arrow Price/Stock=https://www.arrow.com/en/products/ao3400a/alpha-and-omega-semiconductor?region=europe, Datasheet Link=http://aosmd.com/res/data_sheets/AO3400A.pdf, Height=1.25mm, Manufacturer_Part_Number=AO3400A
Q2: "MOSFET (P-Channel)", Manufacturer_Name="Alpha & Omega Semiconductors", Arrow Part Number=AO3401A, Arrow Price/Stock=https://www.arrow.com/en/products/ao3401a/alpha-and-omega-semiconductor?region=nac, Datasheet Link=http://www.aosmd.com/pdfs/datasheet/AO3401A.pdf, Height=1.25mm, Manufacturer_Part_Number=AO3401A
Q3 Q4: library part CMP-83955-000006-1, "MOSFET N-CH 30V 5.7A SOT23", Case/Package=SOT-23, Continuous Drain Current (ID)=5.7A, Drain to Source Voltage (Vdss)=30V, Gate to Source Voltage (Vgs)=12V, Input Capacitance=630pF, Max Operating Temperature=150°C, Max Power Dissipation=1.4W, Min Operating Temperature=-55°C, Lead Free="Lead Free", Mount="Surface Mount", Number of Elements=1, Number of Pins=3, Packaging="Tape and Reel", Power Dissipation=1.4W, Radiation Hardening=No, Rds On Max=26.5mR
R1: library part CMP-2000-00293-2, "RES SMD 180 OHM 1% 1/10W 0603", Manufacturer=Panasonic, Package=ERJ3EK, Power Rating=0.1W, Resistance=180Ω, Temperature="-55°C to +155°C", Temperature Coefficient=100ppm/°C, Temperature Range High=+155°C, Temperature Range Low=-55°C, Tolerance=1%, Voltage Rating=75V, Automotive=Yes, Automotive Grade="Grade 0", Category=Res, ComponentLink2Description=Datasheet, ComponentLink2URL=https://industrial.panasonic.com/cdbs/www-data/pdf/RDA0000/AOA0000C304.pdf, Composition="Thick Film", Device Class L1="Passive Components", Device Class L2=Resistors, Device Class L3="Chip SMD Resistors", Digikey Description="RES SMD 180 OHM 1% 1/10W 0603", Footprint Url=https://industrial.panasonic.com/cdbs/www-data/pdf/RDA0000/DMA0000COL17.pdf, Height=0.55mm, Lead Free=Yes, Manufacturer Part Number=ERJ3EKF1800V, Mouser Description="Thick Film Resistors 0603 180ohms 1% AEC-Q200", Octopart=https://octopart.com/erj-3ekf1800v-panasonic-55421532, RoHS=TRUE, Series=ERJ
R3 R6 R14 R15 R18 R19: library part CMP-2000-07588-1, "Chip Resistor, 10 KOhm, +/- 1%, 0.1 W, -55 to 155 degC, 0402 (1005 Metric), RoHS, Tape and Reel", Case Code (Imperial)=0402, Case Code (Metric)=1005, Manufacturer=Panasonic, Max Operating Temperature=155degC, Max Power Dissipation=100mW, Min Operating Temperature=-55degC, Package Description="2-Pin Surface Mount Device, Body 1 x 0.5 mm", Package Quantity=1, Package Reference=402, Resistance=10KOhm, Temperature Coefficient=100ppm\/degreesC, Tolerance=1%, Voltage Rating=50V, Case\/Package=0402, Composition=ThickFilm, Contact Plating=Tin, Datasheet URL=https://industrial.panasonic.com/cdbs/www-data/pdf/RDA0000/AOA0000C304.pdf, Datasheet Version=02/2017, Depth=0.5mm, Height=0.35mm, Lead Free=LeadFree, Length=1mm, Manufacturer URL=http://www.panasonic.com/, Military Standard=Not, Mount=SurfaceMount, Mounting Technology=SurfaceMount, Number of Pins=2, Number of Terminations=2, Packaging=TapeandReel, Power Rating=100mW, Radiation Hardening=No, REACH SVHC=NoSVHC, RoHSCompliant=True, Termination=SMD/SMT, Voltage Rating (DC)=50V, Width=0.02inch
R4: library part CMP-2003-04309-2, "RES SMD 2.2K OHM 1% 1/4W 1206", Manufacturer=Yageo, Package=RT1206, Power Rating=0.25W, Resistance=2.2KΩ, Temperature="-55°C to +155°C", Temperature Coefficient="50 ppm/°C", Temperature Range High=+155°C, Temperature Range Low=-55°C, Tolerance=0.0002, Voltage Rating=200V, Automotive=No, Category=Res, ComponentLink2Description=Datasheet, ComponentLink2URL=http://www.yageo.com/documents/recent/PYu-RT_1-to-0.01_RoHS_L_9.pdf, Composition="Thin Film", Device Class L1="Passive Components", Device Class L2=Resistors, Device Class L3="Chip SMD Resistors", Digikey Description="RES SMD 2.2K OHM 1% 1/4W 1206", Footprint Url=http://www.yageo.com/exep/pages/download/literatures/PYu-R_Mount_10.pdf, Height=0.65mm, Ipc Land Pattern Name=RESC310160X55, Lead Free=Yes, Manufacturer Part Number=RT1206FRE072K2L, Mouser Description="High Precision-High Stability Chip Resistor Thin Film 1206 2.2kOhm 1% Paper T/R", Octopart=https://octopart.com/rt1206fre072k2l-yageo-1275907, RoHS=TRUE, Series=RT
R5: library part CMP-2000-03013-2, "RES Thick Film, 1MΩ, 1%, 0.1W, 100ppm/°C, 0603", Case Code (Imperial)=0603, Case Code (Metric)=1608, Max Operating Temperature=155°C, Max Power Dissipation=100mW, Min Operating Temperature=-55°C, Package Quantity=10, Resistance=1MR, Temperature Coefficient=100ppm/°C, Tolerance=1%, Voltage Rating=75V, Case/Package=0603, Composition="Thick Film", Contact Plating=Tin, Depth=0.85mm, Features="Automotive AEC-Q200", Height=0.45mm, Lead Free="Lead Free", Length=1.55mm, Military Standard=Not, Mount="Surface Mount", Number of Pins=2, Number of Terminations=2, Packaging="Tape and Reel", Power Rating=100mW, Radiation Hardening=No, Termination=SMD/SMT, Voltage Rating (DC)=75V, Weight=7.1E-05oz, Width=0.85mm
R7: library part CMP-2000-00213-2, "Chip Resistor, 120 Ohm, +/- 1%, 0.1 W, -55 to 155 degC, 0603 (1608 Metric), RoHS, Tape and Reel", Case Code (Imperial)=0603, Case Code (Metric)=1608, Manufacturer=Panasonic, Max Operating Temperature=155degC, Max Power Dissipation=100mW, Min Operating Temperature=-55degC, Package Description="2-Pin Surface Mount Device, Body 1.6 x 0.85 mm", Package Quantity=1, Resistance=120Ohm, Temperature Coefficient=100ppm/degreesC, Tolerance=1%, Voltage Rating=75V, Case/Package=0603, Composition=ThickFilm, Contact Plating=Tin, Datasheet URL=https://industrial.panasonic.com/cdbs/www-data/pdf/RDA0000/AOA0000C283.pdf, Datasheet Version=42095.0, Depth=0.8mm, Height=0.022inch, Lead Free=LeadFree, Length=1.6mm, Manufacturer URL=http://www.panasonic.com/, Military Standard=Not, Mount=SurfaceMount, Number of Pins=2, Number of Terminations=2, Package Reference=0603, Package URL=http://www.st.com/st-web-ui/static/active/en/resource/technical/document/datasheet/CD00001320.pdf, Packaging=TapeandReel, Power Rating=100mW, Radiation Hardening=No, REACH SVHC=NoSVHC, RoHSCompliant=true, Termination=SMD/SMT, Voltage Rating (DC)=75V, Width=0.031inch
R8 R9: library part CMP-2000-00955-7, "RES SMD 2.2K OHM 0.1% 1/10W 0603", Case Code (Imperial)=0603, Case Code (Metric)=1608, Max Operating Temperature=155°C, Max Power Dissipation=100mW, Min Operating Temperature=-55°C, Package Quantity=5000, Ratings=AEC-Q200, Resistance=2.2kR, Resistance Tolerance=0.1%, Resistor Type="Thin Film", Temperature Coefficient=25ppm/°C, Voltage Rating=75V, Case/Package=0603, Construction=Rectangular, Contact Plating=Tin, Depth=0.8mm, Features="Automotive AEC-Q200", Height=0.45mm, Lead Free="Lead Free", Length=1.6mm, Military Standard=Not, Mount="Surface Mount", Number of Pins=2, Number of Terminations=2, Packaging="Tape and Reel", Power Rating=100mW, Radiation Hardening=No, Reach SVHC Compliant=Yes, RoHS Compliant=Yes, Series=ERA-3A, Size Code=0603, Technology="METAL FILM", Termination=SMD/SMT, Tolerance=0.1%, Voltage Rating (DC)=75V, Width=0.8mm
R11 R12: library part CMP-2001-00044-1, Manufacturer=Panasonic, Part Number=ERJ6ENF2200V
R13 R16: library part CMP-1015-00284-2, Manufacturer=Panasonic, Resistance=10Ohm, Part Number=ERJ-14NF10R0U
R17 R22 R23: library part CMP-2000-00956-2, "RES SMD 22K OHM 0.1% 1/10W 0603", Case Code (Imperial)=0603, Case Code (Metric)=1608, Max Operating Temperature=155°C, Max Power Dissipation=100mW, Min Operating Temperature=-55°C, Package Quantity=1, Resistance=22kR, Resistance Tolerance=0.1%, Resistor Type="Thin Film", Temperature Coefficient=25ppm/°C, Voltage Rating=75V, Case/Package=0603, Construction=Rectangular, Contact Plating=Tin, Depth=0.8mm, Features="Automotive AEC-Q200", Height=0.45mm, Lead Free="Lead Free", Length=1.6mm, Military Standard=Not, Mount="Surface Mount", Number of Pins=2, Number of Terminations=2, Packaging="Tape and Reel", Power Rating=100mW, Radiation Hardening=No, REACH SVHC="No SVHC", RoHS Compliant=Yes, Series=ERA-3A, Size Code=0603, Technology="THIN FILM", Termination=Solder, Tolerance=0.1%, Voltage Rating (DC)=75V, Width=0.8mm
R20 R21: library part CMP-2000-00804-1, Manufacturer=Panasonic, Resistance=51K, Part Number=ERJ-3GEYJ513V
R? R? R?: library part CMP-2003-02098-2, "RES Thick Film, 330Ω, 1%, 0.25W, 100ppm/°C, 1206", Case Code (Imperial)=1206, Case Code (Metric)=3216, Max Operating Temperature=155°C, Max Power Dissipation=250mW, Min Operating Temperature=-55°C, Package Quantity=10, Resistance=330R, Temperature Coefficient=100ppm/°C, Tolerance=1%, Voltage Rating=200V, Case/Package=1206, Composition="Thick Film", Contact Plating=Tin, Depth=1.6mm, Features="Automotive AEC-Q200", Height=0.55mm, Lead Free="Lead Free", Length=3.2mm, Military Standard=Not, Mount="Surface Mount", Number of Terminations=2, Packaging="Tape and Reel", Power Rating=250mW, Radiation Hardening=No, Termination=SMD/SMT, Voltage Rating (DC)=200V, Weight=0.000353oz, Width=1.6mm
S1 S2: "Switch", Manufacturer_Name="CUI Devices", Mouser Part Number=179-134035BK160SMTTR, Datasheet Link=https://www.cuidevices.com/product/resource/ts21.pdf, Height=1.7mm, Manufacturer_Part_Number=TS21-34-035-BK-160-SMT-TR, Mouser Price/Stock=https://www.mouser.co.uk/ProductDetail/CUI-Devices/TS21-34-035-BK-160-SMT-TR?qs=1Kr7Jg1SGW9zzGN58LP5Sg%3D%3D
SW1: "Switch", Arrow Part Number="PTS526SMG20SMTR21 LFS", Manufacturer_Name="C & K COMPONENTS", Mouser Part Number=611-PTS526SMG20S21LF, Arrow Price/Stock=https://www.arrow.com/en/products/pts526smg20smtr21-lfs/ck?region=nac, Datasheet Link=https://www.ckswitches.com/media/2780/pts526.pdf, Height=2.15mm, Manufacturer_Part_Number="PTS526SMG20SMTR21 LFS", Mouser Price/Stock=https://www.mouser.co.uk/ProductDetail/CK/PTS526SMG20SMTR21-LFS?qs=MyNHzdoqoQLOqPcVU%2F1RhA%3D%3D
U3: library part CMP-209535-000001-1, "LDO Voltage Regulators 1A, 3.3V", Dropout Voltage=1.1V, Manufacturer="Advanced Monolithic Systems", Max Junction Temp=+125°C, Max Power Dissipation=1.2W, Max Supply Voltage=15V, Nominal Supply Current=5mA, Output Current=1A, Output Voltage=3.3V, Package=AMS1117, Temperature="-40°C to +125°C", Temperature Range Low=-40°C, Automotive=No, Category=IC, ComponentLink2Description=Datasheet, ComponentLink2URL=http://www.advanced-monolithic.com/pdf/ds1117.pdf, Device Class L1="Integrated Circuits (ICs)", Device Class L2="Power Management ICs", Device Class L3="Voltage Regulators - Linear", Height=1.8mm, Ipc Land Pattern Name=SOT229P700X180-4, Lead Free=Yes, Manufacturer Part Number=AMS1117-3.3, Number Of Outputs=1, Octopart=https://octopart.com/ams1117-3.3-advanced+monolithic+systems-25899300, Output Type=Fixed, RoHS=TRUE, Standoff Height=0.64mm, Temperature Range High=+125°C
U5: library part CMP-0314-00263-2, "Low-Voltage 16-Bit I2C and SMBus I/O Expander, 16 Outputs, 1.65 to 5.5 V, -40 to 85 degC, 24-pin TSSOP (PW), Green (RoHS & no Sb/Br)", 5V Tolerant I/O=Yes, Manufacturer="Texas Instruments", Max Frequency(kHz)=400, # of I/Os=16, Code_JEDEC=MO-153, ComponentLink1Description=Datasheet, ComponentLink1URL=http://www.ti.com/general/docs/lit/getliterature.tsp?genericPartNumber=TCA6416A&fileType=pdf, ComponentLink2Description="Package Specification", ComponentLink2URL=http://www.ti.com/litv/pdf/mpds177g, Configuration Registers=Yes, DatasheetVersion=SCPS194A, Eco-Plan="Green (RoHS & no Sb/Br)", fSCLK(Max)(MHz)=400, I2C Address="0100 00x", Interrupt Output=Yes, Low Power=Yes, Mounting Technology="Surface Mount", No. of Outputs=16, PackageDescription="24-Pin Thin Small Outline Package 0.65 mm Pitch", PackageReference=PW0024A, PackageVersion="revG, Feb-2011", PartNumber=TCA6416APWR, Push-Pull I/O Type=Yes, Reset Input=Yes, SubFamily="I2C IO Expander", Vcc range(V)="1.65 to 5.5", VCC(Max)(V)=5.5, VCC(Min)(V)=1.65

## Free pads (board coordinates)
  round 39.37 hole 118.11: ""(1995,1510) ""(1995,4445) ""(4205,1510) ""(4205,4445)

## Via types
v1: diameter 23.62, hole 11.81, Top Layer to Bottom Layer, 1 vias

## Nets (pads, with @x,y where several pads share a name; then routed paths per layer and width w, separated by ;. In a path a pad name is that pad's centre, name@x,y a point inside that pad or via, vN(x,y) a via of type N, cw(c..) or ccw(c..) an arc to the next point about the centre after c; other vN are vias at no path point)
3.3V: C3.1 C4.1 C9.1 C12.2 C14.1 C15.1 IC2.6 J8.1 JP2.1 MD1.2 R3.1 R4.2 R5.2 R6.1 R8.2 R9.2 R14.1 R15.1 R18.2 R19.2 U3.2 U5.2
+5: F1.1 JP1.2
AVRISP_RESET: JP3.1 MD1.25
BATTERY+: J9.2 R13.1
BLUE_LED: R?.1@3735,2889.8 U5.13
CHARGER: J9.1 R16.1
DISPLAY_LED: U5.16
EXT_IO_A: J7.1 U5.4
EXT_IO_B: J7.2 U5.5
EXT_IO_C: J7.3 J7.4 U5.6
EXT_IO_D: U5.7
FUSED5V: 1.1 2.1 C8.1 C13.1 D2.C D.C K1.5 K2.5 Q2.2 R17.2 R20.2 R21.2 U3.3 U5.21 U5.24
GREEN_LED: R?.1@3415,2459.8 U5.15
HSPI_CLK: JP4.1 MD1.13
HSPI_MISO: JP4.2 MD1.14
HSPI_MOSI: JP4.3 MD1.16
i2c_SCK: MD1.11 R8.1 U5.22
i2c_SDA: MD1.12 R9.1 U5.23
IO2: MD1.24 Q1.2 R5.1
IO4: MD1.26
IO5: MD1.29
IO15: JP4.4 MD1.23
IO16: MD1.27 R6.2
IO17: MD1.28
IO21: MD1.33
IO22: MD1.36
IO25: MD1.10
IO32: MD1.8 R1.1
IO33: IC2.1 MD1.9 R14.2
IO34_INPUT: J8.4 MD1.6
IO35_INPUT: IC2.3 MD1.7 R18.1
IO36_INPUT: MD1.4
IO39_INPUT: MD1.5
Net1_2: 1.2 DS1.1
Net2_2: 2.2 DS2.1
Net3_2: 3.2 5.2 Q3.1
Net4_2: 4.2 6.2 Q4.1
NetC11_1: C11.1 IC2.9 R16.2
NetC11_2: C11.2 IC2.10 R13.2
NetD2_A: D2.A DS1.2 K2.4 Q3.3
NetD?_2: D?.2@3710,2655 R?.2@3735,2990.2
NetD_A: D.A DS2.2 K1.4 Q4.3
NetF1_2: F1.2 Q2.3
NetIC1_1: IC1.1 R1.2
NetJ6_1: J6.1 K3.3
NetJ6_2: J6.2 K3.4
NetJ6_3: K4.3
NetJ6_4: J6.4 K4.4
NetJP5_1: JP5.1 R17.1 U5.20
NetK1_1: K1.1 P1.1
NetK1_2: K1.2 P1.2
NetK1_3: K1.3 P1.3
NetK2_1: K2.1 P2.1
NetK2_2: K2.2 P2.2
NetK2_3: K2.3 P2.3
NetK3_1: K3.1 R11.2
NetK4_1: K4.1 R12.2
NetQ2_1: Q2.1 R7.2
NetR15_2: R15.2 U5.1
Receive: 5.1 6.1 C3.2 C4.2 C5.1 C7.1 C8.2 C9.2 C12.1 C13.2 C14.2 C15.2 C16.2 C17.2 D?.1 IC1.2 IC2.7 J8.7 JP1.1 JP2.4 JP3.2 JP5.2 K3.2 K4.2 MD1.1 MD1.15 MD1.38 MD1.39 Q1.3 Q3.2 Q4.2 R7.1 S1.4 S2.4 SW1.1 U3.1 U5.12
RED_LED: R?.1@3415,2839.8 U5.14
RELAY1: U5.8
RELAY2: U5.9
RELAY3_SSR: R11.1 U5.10
RELAY4_SSR: R12.1 U5.11
RELAY_1: 4.1
RELAY_2: 3.1
RESET: C5.2 C7.2 MD1.3 R3.2 R19.1 SW1.3 U5.3
RX1: Q1.1 R4.1
RXD0: JP2.3 MD1.34
SW1_EXT: R21.1 R23.1 S2.2
SW1_OUTPUT: C17.1 R23.2 U5.17
SW1EXT: J8.5
SW2_EXT: R20.1 R22.1 S1.2
SW2_OUTPUT: C16.1 R22.2 U5.19
SW2EXT: J8.6
Transmit: IC1.3
TX1: IC1.4
TXD0: JP2.2 MD1.35
VBUS: IC2.8 J9.4
VSPI_CLK: IC2.5 MD1.30
VSPI_MISO: IC2.4 MD1.31
VSPI_MOSI: IC2.2 MD1.37
pads on no net: "J6. " D?.2@3400,2717.72 D?.2@3411.1,3060 J8.2 J8.3 J9.3 MD1.17 MD1.18 MD1.19 MD1.20 MD1.21 MD1.22 MD1.32 R?.2@3415,2560.2 R?.2@3415,2940.2 S1.1 S1.3 S1.MP1 S1.MP2 S2.1 S2.3 S2.MP1 S2.MP2 SW1.2 SW1.4 SW1.5 SW1.6 U3.4 U5.18
copper on no net: | length 62.6
  Top Layer w10: v1(2779,2840) 2816.62,2840 2816.62,2815

## Text inside footprints (layer, text, board x,y; h text height)
IC2: Top 3D Body "*" at 3718.75,3438 h50; Top Overlay "*" at 3667.5,3475.38 h50